# Altium PCB CH340 programmer pcb.PcbDoc
Units mil, origin at the board's own origin, x right, y up, seen from the top; angles counter-clockwise.
Board outline 1125 x 740 mil, 2 copper layers (Top Layer, Bottom Layer); 18 components, 14 nets, 64 pads, 6 vias.
Unrouted connection lines stored in the file: 36.
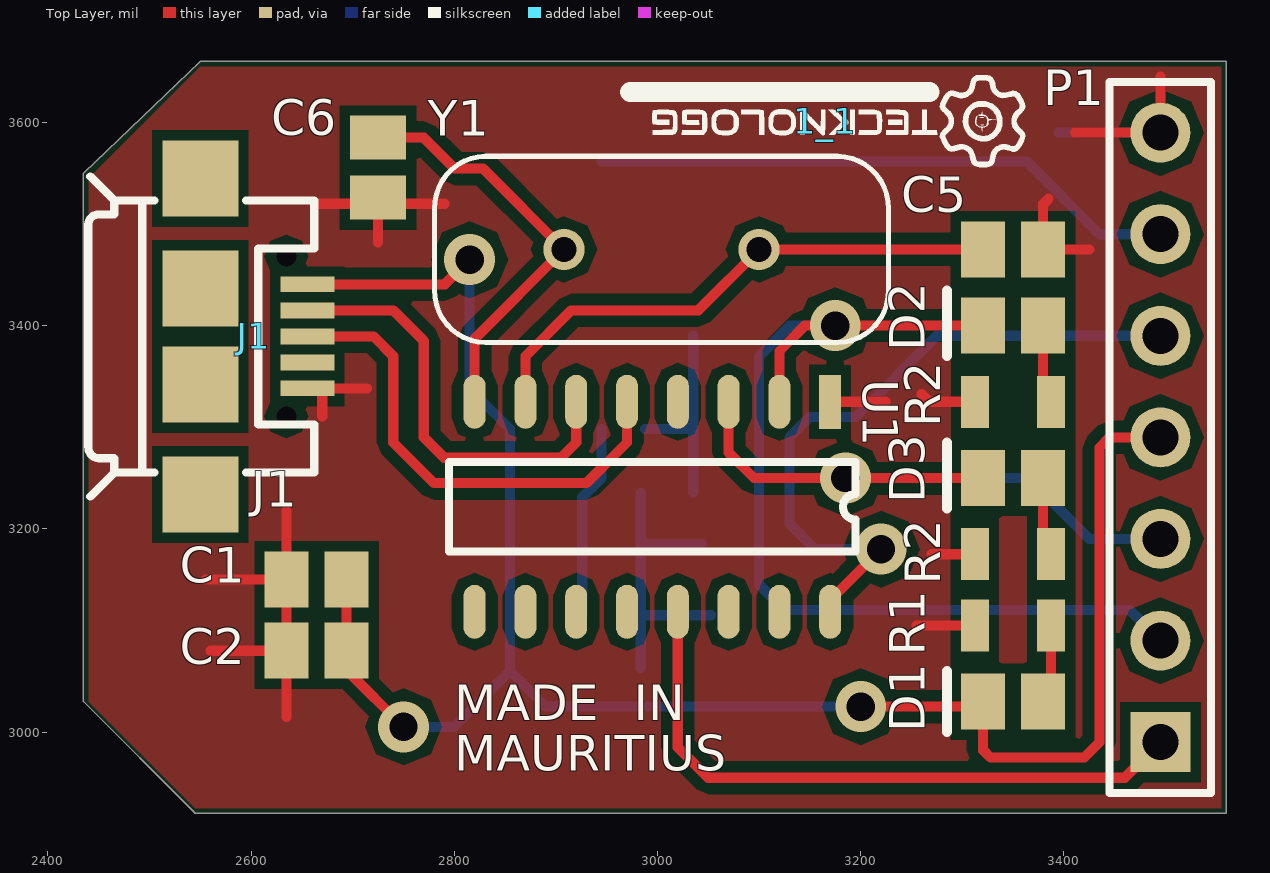
[diagram p0: Top Layer view]
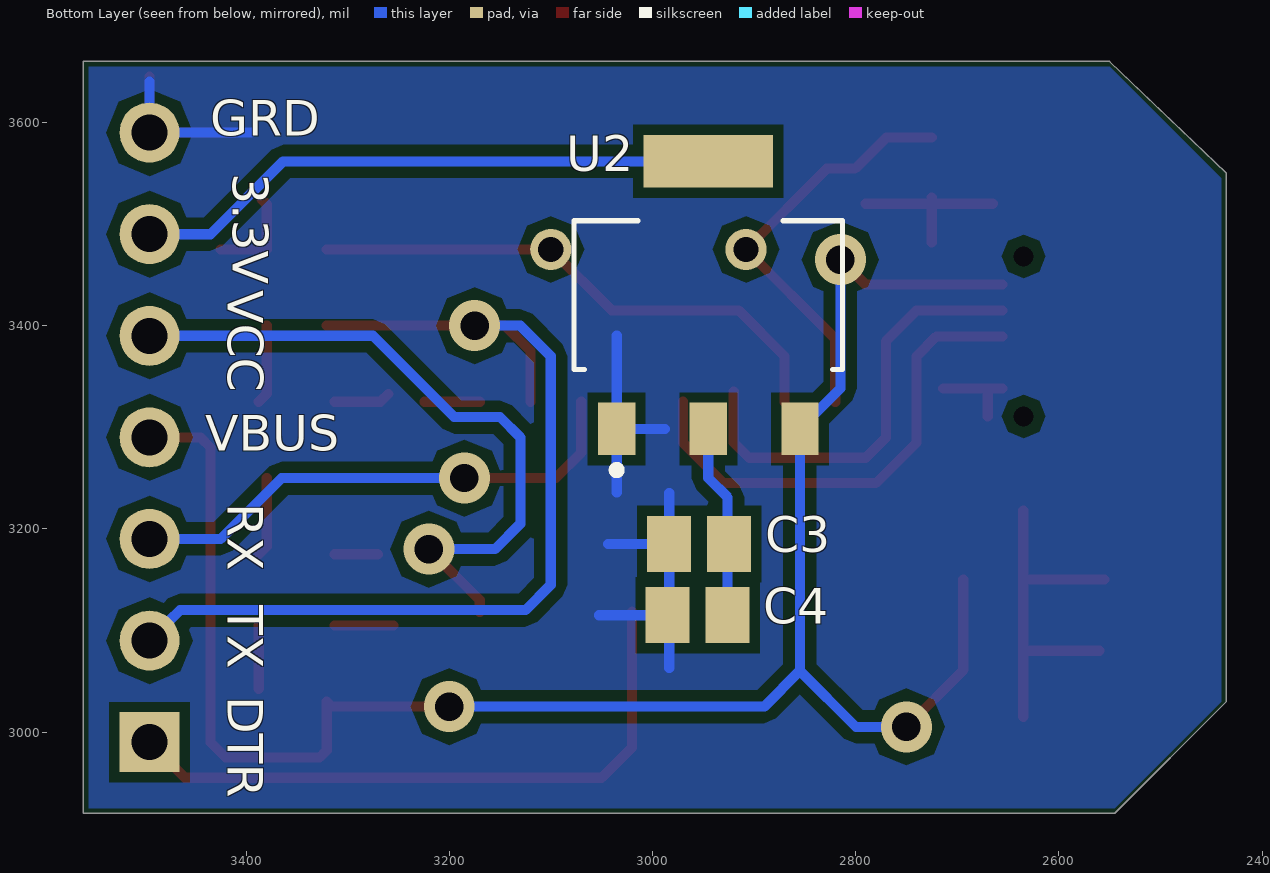
[diagram p1: Bottom Layer view, seen from below]

## Layer stack, top to bottom
Top Solder: solder mask 0.4, Solder Resist, Dk 3.5
Top Layer: signal copper 1.4
Dielectric 1: dielectric 12.6, FR-4, Dk 4.8
Bottom Layer: signal copper 1.4
Bottom Solder: solder mask 0.4, Solder Resist, Dk 3.5

## Board outline
2550,3660 3560,3660 3560,2920 2545,2920 2435,3030 2435,3550

## Design rules (kind name [scope] priority, off if disabled: settings)
Clearance [All] p1: gap=10 ignorepadtopadclearanceinfootprint=FALSE except(0: Arc-Hole Track-Hole SMDPad-Hole THPad-Hole Via-Hole Fill-Hole Poly-Hole Region-Hole Text-Hole)
PolygonConnect [All] p1: connectstyle=Relief reliefconductorwidth=10 reliefentries=4 polygonreliefangle="90 Angle" airgapwidth=10
RoutingVias [All] p1: holewidth=28 width=50 viastyle="Through Hole" minholewidth=28 minwidth=50 maxholewidth=28 maxwidth=50
SolderMaskExpansion [All] p1: expansion=4
Width [All] p1: maxlimit=10 minlimit=10 preferedwidth=10
30 further rules are at their usual default settings.

## Classes and differential pairs
component class "CH340G USB TO SERIAL MODULE": C1 C2 C3 C4 C5 C6 D1 D2 D3 J1 P1 R1 R2 U2 Y1

## Components (designator, comment, footprint, x,y, rotation, side; value= is the part's Value field where it differs from the comment)
1_1 "" IMAGE 3165,3601.24 r180 top
C1 "Cap" C0805 2664.53,3150 r0 top value=10uF
C2 "Cap" C0805 2664.53,3080 r0 top value=100nF
C3 "Cap" C0805 2953.94,3185 r180 bottom value=100pF
C4 "Cap" C0805 2955.47,3115 r180 bottom value=100pF
C5 "Cap" C0805 3350,3475 r180 top value=100pF
C6 "Cap" C0805 2725,3555.47 r90 top value=100pF
D1 "LED2" C0805 3350,3030 r0 top
D2 "LED2" C0805 3350,3400 r0 top
D3 "LED2" C0805 3350,3250 r0 top
J1 "1734035-1" USB-MICRO-HW-MC-5F 2550,3389.45 r270 top
P1 "Header 7" HDR1X7 3495,2990 r90 top
R1 "Res2" R0805 3350,3105 r0 top value=1K
R2 "Res2" R0805 3350,3325 r180 top value=1K
R2 "Res2" R0805 3350,3175 r180 top value=1K
U1 "CH340G" SOP16 3170,3325 r270 top
U2 "AMS1117-3.3" *SOT229P700X180-4N 2945,3430 r180 bottom
Y1 "XTAL" *XTAL_ECS-80-20-4X 3003.94,3475 r180 top

## Footprints (in the part's own frame and the unit in brackets; to place one, negate y for a bottom-side part, rotate by r counter-clockwise, add the part's x,y. Pads: shape width x height; smd on the part's side, far side on the other; paste and mask are expansions set on the pad)
*SOT229P700X180-4N [mm]
  rect 0.93x1.31 smd: 1(-2.29,-3.345) 2(0,-3.345) 3(2.29,-3.345)
  rect 3.24x1.31 smd: 4(0,3.345)
  silkscreen extent -3.36,-4.47 3.36,1.86
*XTAL_ECS-80-20-4X [mm]
  round 1.03 hole 0.63: 1(-2.44,0) 2(2.44,0)
  silkscreen extent -5.68,-2.33 5.68,2.33
C0805 [mm] "Chip Capacitor, Body 2.0x1.3mm, IPC High Density"
  rect 1.1x1.4 smd: 1(-0.75,0) 2(0.75,0)
  body extent -1.1,-0.72 1.1,0.72, height 1.4
HDR1X7 [mm] "Connector; Header; 7 Position"
  rect 1.5x1.5 hole 0.9: 1(0,0)
  round 1.5 hole 0.9: 2(2.54,0) 3(5.08,0) 4(7.62,0) 5(10.16,0) 6(12.7,0) 7(15.24,0)
  silkscreen extent -1.27,-1.27 16.51,1.27
IMAGE [mil]
  silkscreen extent -197,-45 197,45
R0805 [mm]
  rect 0.7x1.3 smd: 1(-0.95,0) 2(0.95,0)
SOP16 [mm]
  rect 1.35x0.55 smd: 1(0,0)
  oval 1.35x0.55 smd: 2(0,-1.27) 3(0,-2.54) 4(0,-3.81) 5(0,-5.08) 6(0,-6.35) 7(0,-7.62) 8(0,-8.89) 9(5.25,-8.89) 10(5.25,-7.62) 11(5.25,-6.35) 12(5.25,-5.08) 13(5.25,-3.81) 14(5.25,-2.54) 15(5.25,-1.27) 16(5.25,0)
  silkscreen extent 1.51,-9.53 3.74,0.64
USB-MICRO-HW-MC-5F [mm]
  rect 0.38x1.35 smd: 1(-1.3,2.675) 5(1.3,2.675)
  rect 0.4x1.35 smd: 2(-0.65,2.675) 3(0,2.675) 4(0.65,2.675)
  rect 1.9x1.9 smd: 6(-3.95,0) 7(-1.2,0) 8(1.2,0) 9(3.95,0)
  round 0 hole 0.5 unplated: 10(-2,2.15) 11(2,2.15)
  silkscreen extent -4,-2.8 4,2.85, body extent -3.99,-2.78 3.99,2.65, height 2.71

## Part data
C1 C2 C3 C4 C5 C6: "Capacitor", LatestRevisionDate=17-Jul-2002, LatestRevisionNote="Re-released for DXP Platform.", PackageDescription="Radial Cap, Thru-Hole; 2 Leads; 0.3 in Pin Spacing", PackageReference=RAD-0.3, Published=8-Jun-2000, Publisher="Altium Limited"
D1 D2 D3: "Typical RED, GREEN, YELLOW, AMBER GaAs LED", LatestRevisionDate=17-Jul-2002, LatestRevisionNote="Re-released for DXP Platform.", PackageDescription="SM LED; 2 Flat Leads", PackageReference=3.2X1.6X1.1, PackageVersion=Feb-2002, Published=8-Jun-2000, Publisher="Altium Limited"
J1: "Mini USB,R/A,SMT,B Type,pbFree", Package=None, Availability=Unavailable, Centerline_Pitch=".8 mm[.031 in]", EU_RoHS_Compliance=Compliant, MF="TE Connectivity", MP=1734035-1, Number_of_Positions=5, Price=None, Product_Type=Connector, SnapEDA_Link=https://www.snapeda.com/parts/1734035-1/TE%20Connectivity%20AMP%20Connectors/view-part/?ref=snap, TE_purchase_URL=https://www.te.com/usa-en/product-1734035-1.html?te_bu=Cor&te_type=disp&te_campaign=seda_glo_cor-seda-global-disp-prtnr-fy19-seda-model-bom-cta_sma-317_1&elqCampaignId=32493
P1: "Header, 7-Pin", LatestRevisionDate=17-Jul-2002, LatestRevisionNote="Re-released for DXP Platform.", Publisher="Altium Limited"
R1 R2 R2: "Resistor", LatestRevisionDate=17-Jul-2002, LatestRevisionNote="Re-released for DXP Platform.", PackageDescription="Axial Device, Thru-Hole; 2 Leads; 0.4 in Pin Spacing", PackageReference=AXIAL-0.4, Published=8-Jun-2000, Publisher="Altium Limited"
U2: "Sot223/Pkg 1-Amp 3.3-Volt Low Drop Out Voltage Regulatator", Package=None, Availability=Unavailable, MF="Advanced Monolithic Systems", MP=AMS1117-3.3, Price=None, SnapEDA_Link=https://www.snapeda.com/parts/AMS1117-3.3/Advanced%20Monolithic%20Systems/view-part/?ref=snap
Y1: "Crystal Oscillator", LatestRevisionDate=17-Jul-2002, LatestRevisionNote="Re-released for DXP Platform.", PackageDescription="Crystal, Thru-Hole; 2 Leads; Body 3.1 x 8.2 mm (Dia.xH)", PackageReference=R38, Published=8-Jun-2000, Publisher="Altium Limited"

## Via types
v1: diameter 50, hole 28, Top Layer to Bottom Layer, 6 vias

## Nets (pads, with @x,y where several pads share a name; then routed paths per layer and width w, separated by ;. In a path a pad name is that pad's centre, name@x,y a point inside that pad or via, vN(x,y) a via of type N, cw(c..) or ccw(c..) an arc to the next point about the centre after c; other vN are vias at no path point)
3.3V: C3.2 C4.2 P1.6 U1.4 U2.2
D+: J1.3 U1.5
D-: J1.2 U1.6
DTR: P1.1 U1.13
GND: C1.1 C2.1 C3.1 C4.1 C5.1 C6.1 J1.5 P1.7 R1.1 R2.2 U1.1 U2.1
NetC5_2: C5.2 U1.7 Y1.1
NetC6_2: C6.2 U1.8 Y1.2
NetD1_2: D1.2 R1.2
NetD2_2: D2.2 R2.1@3387.4,3325
NetD3_2: D3.2 R2.1@3387.4,3175
RXD: D3.1 P1.3 U1.3
TXD: D2.1 P1.2 U1.2
VBUS: C1.2 C2.2 D1.1 J1.1 P1.4 U2.3
VCC: P1.5 U1.16
pads on no net: J1.4 J1.6 J1.7 J1.8 J1.9 J1.10 J1.11 U1.9 U1.10 U1.11 U1.12 U1.14 U1.15 U2.4
copper on no net: | length 9542.1
  Top Layer w10: 2555,3150 2635,3150 ; 2560,3080.02 2634.98,3080.02 2635,3015 2635,3150 ; 2635,3217.88 2635,3150 ; 2655.32,3338.27 2713.79,3338.27 2670,3338.27 2670,3310.71 ; 2655.32,3389.45 2720.51,3389.45 2739.96,3370 2739.96,3285.04 2780,3245 2930,3245 2970,3285 2970,3325 ; 2655.32,3415.04 2739.96,3415.04 2770,3385 2770,3290 2790,3270 2905,3270 2920,3285 2920,3335 ; 2655.32,3440.63 2790.63,3440.63 v1(2815,3465) ; 2665,3520 2725,3520 2790.38,3520 ; 2694.06,3150 2694.06,3060.94 v1(2750,3005) ; 2725,3481.79 2725,3525.94 ; 2725,3585 2770,3585 2800.47,3554.53 2828.35,3554.53 2907.87,3475 2820,3387.13 2820,3325 ; 2870,3325 2870,3370 2915.04,3415.04 3040.04,3415.04 3100,3475 3320.47,3475 ; 3020,3118.31 3020,2985 3050,2955 3460,2955 3495,2990 ; 3070,3325 3070,3275 3095,3250 3320.47,3250 ; 3120,3325 3120,3375 3145,3400 3320.47,3400 ; 3170,3118.31 3170,3130 v1(3220,3180) ; 3170,3325 3224.16,3325 ; v1(3200,3025) 3315.47,3025 3320.47,3030 3320.47,2982.13 3327.6,2975 3420,2975 3435,2990 3435,3280 3445,3290 3495,3290 ; 3255,3105 3312.6,3105 ; 3260,3332.78 3267.78,3325 3312.6,3325 ; 3270,3175 3312.6,3175 ; 3379.53,3250 3379.53,3182.87 3387.4,3175 ; 3379.53,3400 3379.53,3332.87 3387.4,3325 ; 3385,3525 3379.53,3519.53 3379.53,3475 3425,3475 ; 3387.4,3042.6 3387.4,3105 ; 3411.18,3590 3495,3590 ; 3495,3581.02 3495,3590 ; 3495,3645 3495,3590
  Bottom Layer w10: v1(2750,3005) 2799.68,3005 2854.84,3060.16 ; v1(2815,3465) 2815,3338.15 2854.84,3298.31 2854.84,3060.16 ; 2925.94,3115 2925.94,3230.94 2945,3250 2945,3298.31 ; 2945,3561.69 3363.31,3561.69 3435,3490 3495,3490 ; 2983.46,3062.88 2983.46,3185 ; 2983.46,3235.3 2983.46,3185 ; 2985,3115 3052.5,3115 ; 2987.79,3298.31 3035.16,3298.31 ; 3035.16,3235.79 3035.16,3298.31 ; 3035.16,3390.16 3035.16,3298.31 ; 3043.76,3185 2983.46,3185 ; v1(3175,3400) 3130,3400 3100,3370 3100,3145 3125,3120 3465,3120 3475,3110 3495,3090 ; v1(3185,3250) 3365,3250 3425,3190 3495,3190 ; v1(3200,3025) 2890,3025 2854.84,3060.16 ; v1(3220,3180) 3155,3180 3130,3205 3130,3290 3150,3310 3195,3310 3275,3390 3505,3390 ; 3395,3590 3495,3590 3495,3640

## Polygon pours and split planes (outlines as drawn)
no net on Bottom Layer "Bottom Layer-No Net" (solid, pour order 2): 2440,3545 2550,3655 3555,3655 3555,2925 2545,2925 2440,3030
no net on Top Layer "Top Layer-No Net" (solid, pour order 0): 2440,3544.96 2550,3654.96 2550,3655 3555,3655 3555,2925 2545,2925 2440,3030

## Silkscreen, mask and mechanical layers (free items; w line width, h text height)
Top Overlay:
  lines w10: 3285,3000 3285,3060 ; 3285,3220 3285,3285 ; 3285,3370 3285,3434.25
  lines w20: 2973.16,3630 3267.78,3630
  text "J1" at 2600,3210 h60
  text "MADE" at 2800,3000 h60
  text "IN" at 2976.49,3000 h60
  text "MAURITIUS" at 2800,2950 h60
Bottom Overlay:
  text "GRD" at 3435,3575 h60
  text "3.3V" at 3425,3550 h60 r90
  text "VCC" at 3430,3435 h60 r90
  text "VBUS" at 3440,3265 h60
  text "RX" at 3430,3225 h60 r90
  text "TX" at 3430,3125 h60 r90
  text "DTR" at 3430,3035 h60 r90
Mechanical 1:
  lines w10: 2440,3185 2440,3545.98 2549.02,3655 3555,3655 3555,2925 2545,2925 2440.56,3029.44 2440.56,3389.44